# EAGLE board LCD_Disp_AIR (EAGLE 6.5.0)
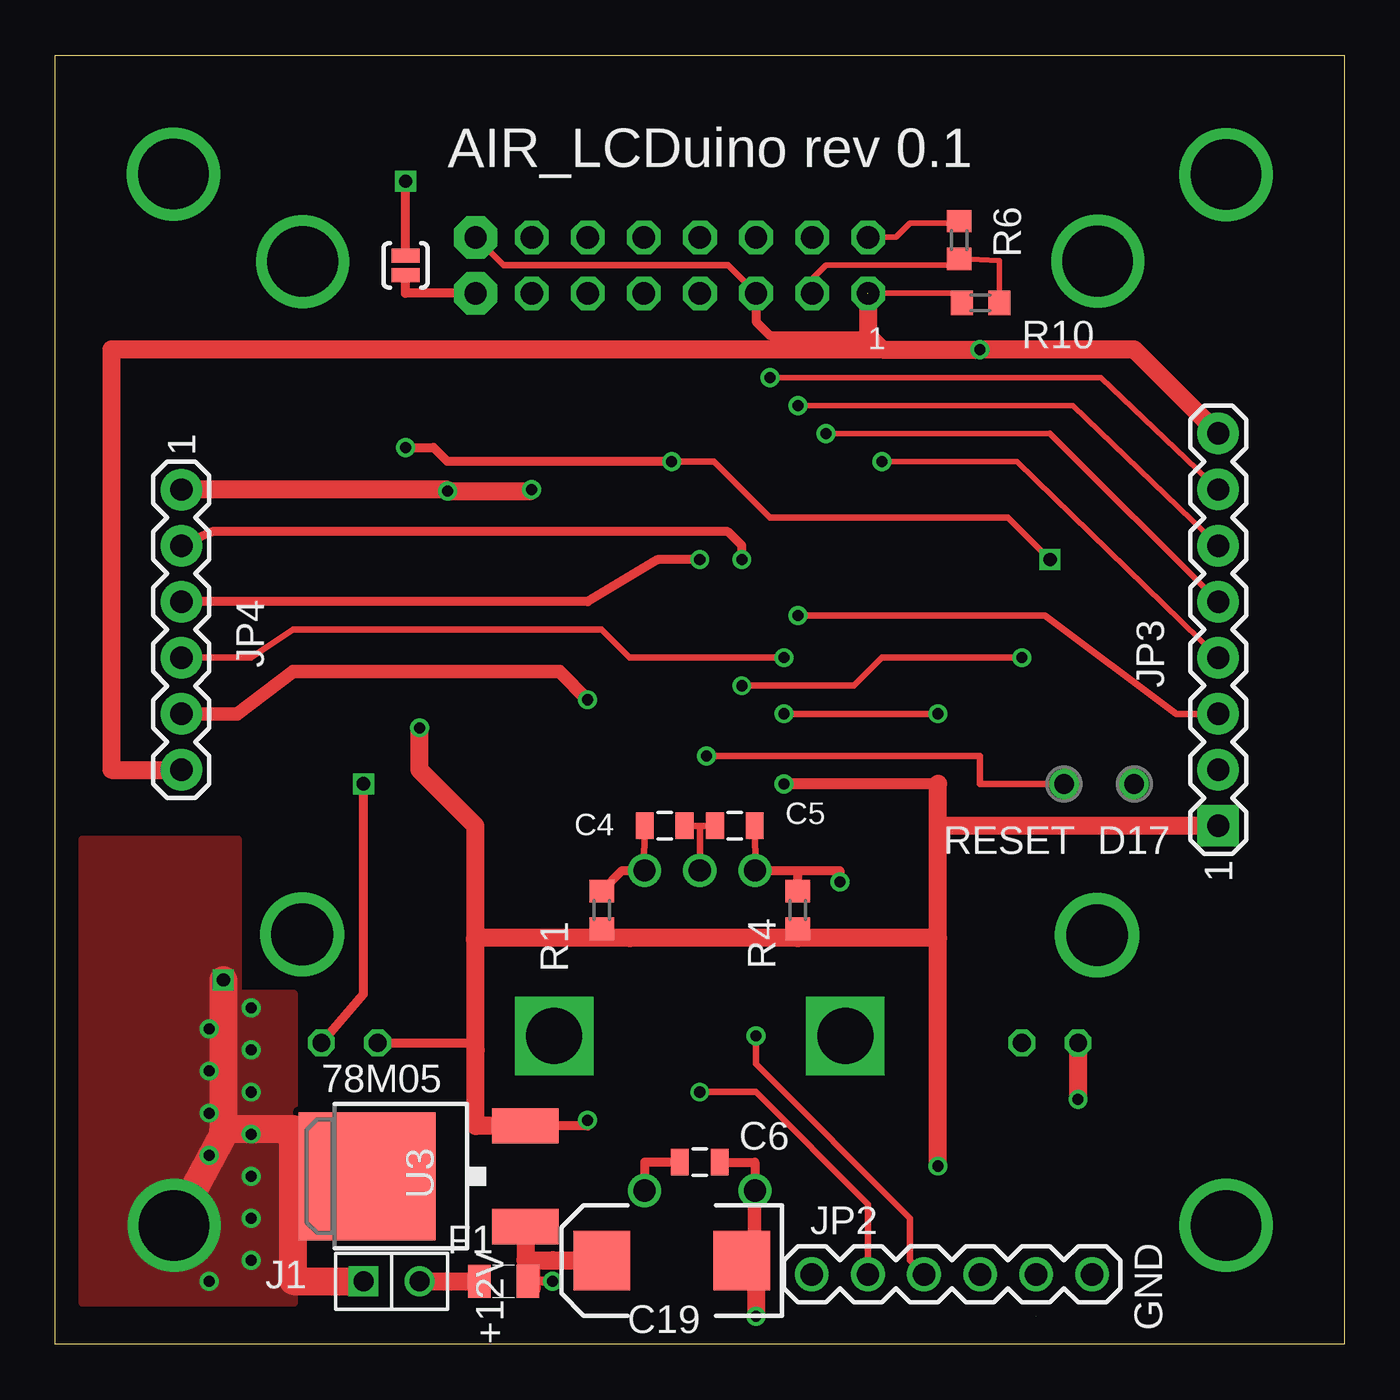
[diagram p0: board, top side]
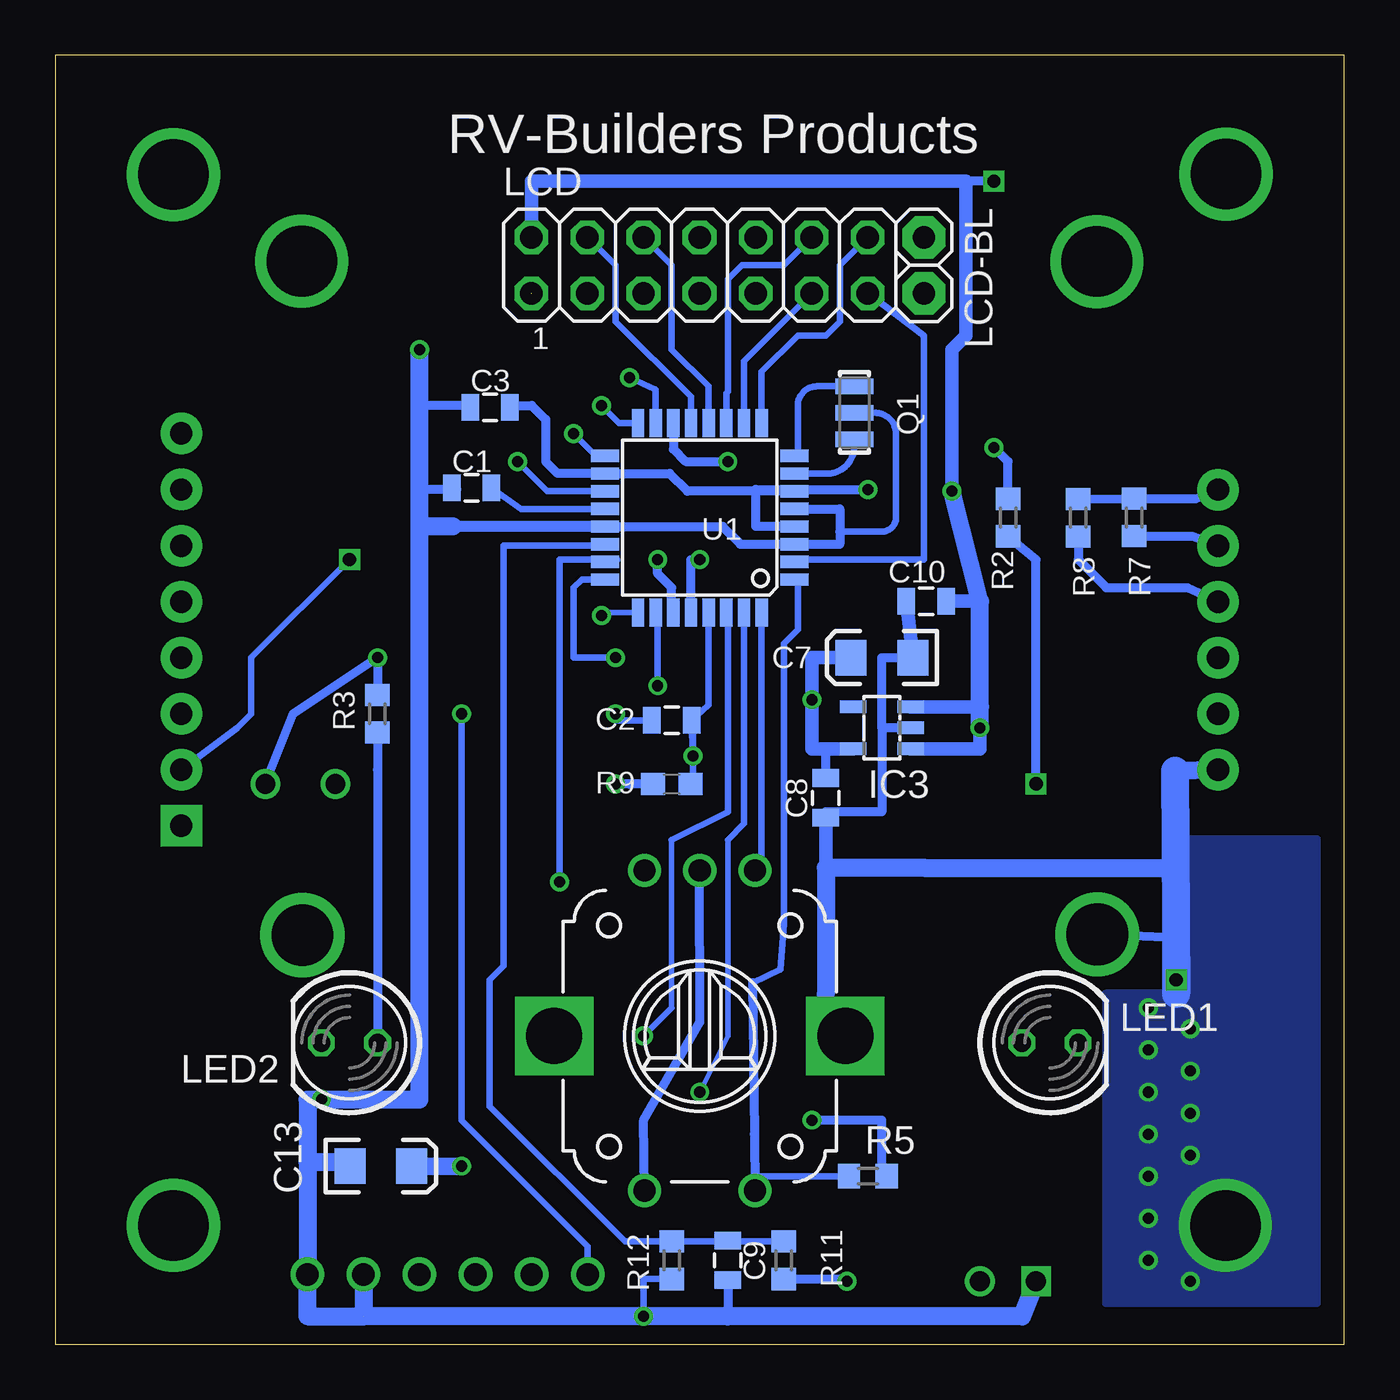
[diagram p1: board, bottom side, seen from below]

Size 58.42 x 58.42 mm. Coordinates in mm from the lower left corner, seen from the top.
Outline: 0,58.42 58.42,58.42 58.42,0 0,0 0,58.42
Copper layers (1*16): Top 0.0356mm / dielectric 1.5011mm / Bottom 0.0356mm
Design rules "OSH": minimum track width 6mil, minimum drill 13mil, track to track 6mil, track to pad 6mil, pad to pad 6mil, via to via 6mil, smd to smd 6mil, copper to edge 15mil, drill to drill 6mil, minimum pad ring 7mil, minimum via ring 7mil, stop-mask expansion 3mil, vias tented up to drill 0mil, thermal gap 10mil
Net classes: 1 vcc: width 0.254 mm

## Footprints (pad centres in the part's own frame; a part is rotated, then mirrored left to right if it is on the bottom)
0805 = smd 0.8 x 1.2: 1 -0.9,0; 2 0.9,0
EIA3216 = smd 1.4 x 1.6: A 1.4,0; C -1.4,0
EIA7343 = smd 2.55 x 2.7: A 3.17,0; C -3.17,0
P1-13 = drill 0.9: 1 0,0
PTC0805 = smd 1 x 1.5: 1 -1.1,0; 2 1.1,0
SOT23-5 = smd 0.55 x 1.2: 1 -0.95,-1.3; 2 0,-1.3; 3 0.95,-1.3; 4 0.95,1.3; 5 -0.95,1.3
M1X2 = drill 0.9 square: 1 -1.27,0 | drill 0.9: 2 1.27,0
1X06 = drill 1.016: 1 0,0; 2 2.54,0; 3 5.08,0; 4 7.62,0; 5 10.16,0; 6 12.7,0
1X08 = drill 1.016 pad 1.88 square: 1 0,0 | drill 1.016 pad 1.88: 2 2.54,0; 3 5.08,0; 4 7.62,0; 5 10.16,0; 6 12.7,0; 7 15.24,0; 8 17.78,0
1X06' = drill 1.016 pad 1.88: 1 0,0; 2 2.54,0; 3 5.08,0; 4 7.62,0; 5 10.16,0; 6 12.7,0
2X07 = drill 1.016 octagon: 1 -7.62,-1.27; 2 -7.62,1.27; 3 -5.08,-1.27; 4 -5.08,1.27; 5 -2.54,-1.27; 6 -2.54,1.27; 7 0,-1.27; 8 0,1.27; 9 2.54,-1.27; 10 2.54,1.27; 11 5.08,-1.27; 12 5.08,1.27; 13 7.62,-1.27; 14 7.62,1.27
1X02 = drill 1.016 pad 1.93 octagon: 1 -1.27,0; 2 1.27,0
LED-5MM = drill 0.813 octagon: A -1.27,0; K 1.27,0
RESONATOR-SMD = smd 0.7 x 1.7: 1 -1.2,0; 2 0,0; 3 1.2,0
R603 = smd 1 x 1.1: 1 -0.85,0; 2 0.85,0
0603 = smd 1.1 x 1: 1 -0.85,0; 2 0.85,0
SJ_2S-NO = smd 0.635 x 1.27: 1 -0.45,0; 2 0.45,0
PEC12_INCREMENTAL_ENCODER = drill 1: A -2.5,-7.5; B 2.5,-7.5; C 0,-7.5; P1 -2.5,7; P2 2.5,7 | drill 2.54 square: GND@1 -6.6,0; GND@2 6.6,0
TQFP32-08 = smd 1.27 x 0.559: 1 -4.293,2.8; 2 -4.293,2; 3 -4.293,1.2; 4 -4.293,0.4; 5 -4.293,-0.4; 6 -4.293,-1.2; 7 -4.293,-2; 8 -4.293,-2.8; 17 4.293,-2.8; 18 4.293,-2; 19 4.293,-1.2; 20 4.293,-0.4; 21 4.293,0.4; 22 4.293,1.2; 23 4.293,2; 24 4.293,2.8 | smd 0.559 x 1.27: 9 -2.8,-4.293; 10 -2,-4.293; 11 -1.2,-4.293; 12 -0.4,-4.293; 13 0.4,-4.293; 14 1.2,-4.293; 15 2,-4.293; 16 2.8,-4.293; 25 2.8,4.293; 26 2,4.293; 27 1.2,4.293; 28 0.4,4.293; 29 -0.4,4.293; 30 -1.2,4.293; 31 -2,4.293; 32 -2.8,4.293
DPACK = smd 1.6 x 3: 1 -2.28,-4.8; 3 2.28,-4.8 | smd 5.8 x 6.2: 4 0,2.38

## Placement (x,y rotation side)
C1  0.1uF  [0805]  39.55,38.81 0 bottom
C2  0.1uF  [0805]  30.48,28.28 180 bottom
C3  0.1uF  [0805]  38.71,42.47 0 bottom
C4  0.1uF  [0805]  27.62,23.5 180 top
C5  0.1uF  [0805]  30.8,23.5 0 top
C6  0.1uF  [0805]  29.21,8.25 180 top
C7  10uF  [EIA3216]  20.96,31.12 180 bottom
C8  0.1uF  [0805]  23.5,24.77 270 bottom
C9  0.1uF  [0805]  27.94,3.81 270 bottom
C10  0.1uF  [0805]  18.95,33.68 180 bottom
C13  10uF  [EIA3216]  43.66,8.08 0 bottom
C19  10uF  [EIA7343]  27.95,3.8 180 top
D17  D17-A3-PC3  [P1-13]  48.9,25.4 0 top
F1  4A  [PTC0805]  20.32,2.86 0 top
IC3  TC10553.3V  [SOT23-5]  20.96,27.94 90 bottom
J1  12V input  [M1X2]  15.24,2.86 0 top
JP2  5V UART  [1X06]  34.29,3.17 0 top
JP3  1  [1X08]  52.71,23.5 90 top
JP4  1  [1X06']  5.72,38.73 270 top
LCD  LCD  [2X07]  29.22,48.9 0 bottom
LCD-BL  [1X02]  19.05,48.9 270 bottom
LED1  [LED-5MM]  13.34,13.67 0 bottom
LED2  [LED-5MM]  45.09,13.67 180 bottom
Q1  16MHz  [RESONATOR-SMD]  22.2,42.21 270 bottom
R1  10k  [R603]  24.77,19.69 270 top
R2  470  [R603]  15.24,37.47 90 bottom
R3  470  [R603]  43.81,28.57 90 bottom
R4  10k  [R603]  33.66,19.69 90 top
R5  10k  [R603]  21.59,7.62 0 bottom
R6  [R603]  40.97,50.04 90 top
R7  100k  [R603]  9.53,37.48 270 bottom
R8  100k  [R603]  12.06,37.46 270 bottom
R9  10K  [0603]  30.48,25.39 180 bottom
R10  120  [R603]  41.94,47.19 0 top
R11  14K  [R603]  25.4,3.81 270 bottom
R12  6.8K  [R603]  30.48,3.81 90 bottom
RESET  SOLDER_POINTA  [P1-13]  45.72,25.4 0 top
SJ1  BACKLIGHT  [SJ_2S-NO]  15.88,48.9 270 top
SW1  ENCODER_SW1-PEC12  [PEC12_INCREMENTAL_ENCODER]  29.21,13.97 180 bottom
U1  ATMEGA328P-AU(R)  [TQFP32-08]  29.21,37.46 180 bottom
U3  78M05  [DPACK]  16.51,7.62 90 top

## Library data of the parts
C1-C10 C13 C19 JP2 Q1 R9 U1 = SparkFun
D17 IC3 LCD-BL RESET = 1AA_Stofer
F1 J1 LED1 LED2 R1-R8 R10-R12 SW1 = dp_devices
JP3 JP4 = SparkFun-Connectors
LCD = pinhead
SJ1 = SparkFun-Passives
U3 = wifi_WX

## Nets
5V: C3.2 C10.1 C13.A IC3.1 IC3.3 JP3.1 JP4.1 LCD.2 LED1.A R1.2 R4.1 R5.2 R6.2 R7.1 R8.1 R9.2 SJ1.1 U1.4 U1.6 U1.18 U3.3
12V_INPUT: C19.A F1.2 R11.2 U3.1
A0_PC0: C5.2 R4.2 SW1.B U1.23
A1_PC1: JP4.4 U1.24
A2_PC2: JP3.3 U1.25
A3_PC3: D17.1 R3.2 U1.26
A4_PC4_SDA: JP4.2 R7.2 U1.27
A5_PC5_SCL: JP4.3 R8.2 U1.28
ADC6: JP3.4 U1.19
ADC7: C9.1 R11.1 R12.2 U1.22
AREF: C1.2 U1.20
D2_PD2(INT0): C4.2 R1.1 SW1.A U1.32
D3_PD3(INT1): C6.2 R5.1 SW1.P1 U1.1
D4_PD4: LCD.13 U1.2
D5_PD5: LCD.14 U1.9
D6_PD6: LCD.11 U1.10
D7_PD7: LCD.12 U1.11
D8_PB0: LCD.6 U1.12
D9_PB1: LCD.4 U1.13
D10_PB2_SS: JP3.2 R2.2 U1.14
D11_PB3_MOSI: JP3.7 U1.15
D12_PB4_MISO: JP3.6 U1.16
D13_PB5_SCK: JP3.5 U1.17
GND: C1.1 C3.1 C4.1 C5.1 C6.1 C7.C C8.2 C9.2 C10.2 C13.C C19.C IC3.2 J1.1 JP2.5 JP2.6 JP3.8 JP4.6 LCD-BL.1 LCD.1 LCD.5 LED2.K Q1.2 R10.1 R12.1 SW1.C SW1.P2 U1.3 U1.5 U1.21 U3.4
N$2: LCD.3 R6.1 R10.2
N$5: Q1.1 U1.8
N$6: C2.2 JP2.1
N$9: Q1.3 U1.7
N$11: F1.1 J1.2
N$12: LED1.K R2.1
N$13: LCD-BL.2 SJ1.2
N$15: LED2.A R3.1
RESET: C2.1 R9.1 RESET.1 U1.29
RXI: JP2.3 U1.30
TXO: JP2.2 U1.31
V3_3V: C7.A C8.1 IC3.5 JP4.5

## Tracks (layer width: path | path; a pad name or v marks a point on that pad's centre or on a via)
5V  (via drill 0.5, 0.6)
  Top 0.254: LCD.2 38.1,50.17 38.73,50.8 40.88,50.8 R6.2
  Top 0.406: R1.2 26.04,18.41 | v24.13,10.16 24.13,9.9 U3.3 19.06,9.9 19.06,13.34 19.06,13.66 LED1.A | R4.1 33.66,18.41 | SJ1.1 v15.88,52.7
  Top 0.508: 40.01,23.5 40.01,25.4 34.29,25.4 v33.02,25.4
  Top 0.813: v21.59,38.73 21.51,38.66 v17.78,38.66 17.78,38.73 JP4.1 | JP3.1 40.64,23.5 40.01,23.5 | v40.01,8.08 40.01,18.41 | 19.05,18.41 19.03,18.38 19.06,18.2 19.06,13.34 19.06,9.9 U3.3 | 19.05,18.41 19.05,23.5 16.51,26.04 v16.51,27.94 | 40.01,18.41 33.66,18.41 26.04,18.41 19.05,18.41 | 40.01,18.41 40.01,25.4
  Bottom 0.254: 26.67,38.1 26.67,38.73
  Bottom 0.406: U1.6 26.67,38.66 | 26.67,38.66 29.77,38.66 30.57,39.46 U1.18 35.65,39.46 36.2,40.01 36.2,41.91 36.83,42.55 37.98,42.55 C3.2 | 26.67,38.66 26.67,38.1 26.67,37.06 U1.4 | 26.67,38.73 v21.59,38.73 | R8.1 R7.1 6.73,38.33 JP4.1 | R9.2 32.39,25.39 v33.02,25.4 | R5.2 20.96,7.62 20.96,10.16 v24.13,10.16 | v15.88,52.7 17.78,52.7
  Bottom 0.61: IC3.3 16.51,28.89 | v16.51,27.94 16.51,26.99 IC3.1 | 16.51,33.68 C10.1 | LCD.2 36.83,52.7 17.78,52.7 17.14,52.7 17.14,45.72 17.78,45.09 v17.78,38.66
  Bottom 0.813: 16.51,33.66 v17.78,38.66 | C13.A v40.01,8.08 | v16.51,27.94 16.51,28.89 16.51,33.66 | 16.51,33.66 16.51,33.68
12V_INPUT  (via drill 0.5)
  Top 0.406: v22.54,2.86 F1.2
  Top 0.813: C19.A 22.55,3.81 21.59,3.81 | U3.1 21.31,3.81 21.59,3.81 | F1.2 21.59,2.54 21.59,3.81
  Bottom 0.406: R11.2 22.86,2.96 v22.54,2.86
A0_PC0  (via drill 0.5)
  Top 0.305: C5.2 31.77,21.47
  Top 0.406: SW1.B 31.77,21.47 33.66,21.47 | 33.66,21.47 35.56,21.47 v35.56,20.96 | R4.2 33.66,21.47
  Bottom 0.305: 33.02,35.56 35.56,35.56 v35.56,20.96
  Bottom 0.406: U1.23 33.02,35.56
A1_PC1  (via drill 0.5)
  Top 0.305: JP4.4 8.89,31.12 10.8,32.38 24.77,32.38 26.04,31.12 v33.02,31.12
  Bottom 0.305: U1.24 34.55,34.66 34.93,34.29 34.93,31.12 v33.02,31.12
A2_PC2  (via drill 0.5)
  Top 0.305: v33.66,33.02 44.86,33.02 50.8,28.57 JP3.3
  Bottom 0.254: U1.25 33.51,33.17 v33.66,33.02
A3_PC3  (via drill 0.5)
  Top 0.305: v31.12,29.84 36.2,29.84 37.47,31.12 v43.81,31.12
  Bottom 0.305: U1.26 31.12,33.17 v31.12,29.84
  Bottom 0.406: R3.2 v43.81,31.12 47.62,28.57 D17.1
A4_PC4_SDA  (via drill 0.5)
  Top 0.406: v31.12,35.56 31.12,36.2 30.48,36.83 7.11,36.83 JP4.2
  Bottom 0.406: U1.27 30.48,33.24 30.48,34.29 31.12,34.93 v31.12,35.56 | R7.2 6.91,36.62 JP4.2
A5_PC5_SCL  (via drill 0.5)
  Top 0.406: v29.21,35.56 27.3,35.56 24.13,33.66 6.35,33.66 6.35,33.53 JP4.3
  Bottom 0.406: U1.28 29.61,35.56 v29.21,35.56 | R8.2 12.06,35.56 10.8,34.29 7.11,34.29 JP4.3
ADC6  (via drill 0.5)
  Top 0.254: v37.47,40.01 43.59,40.01 JP3.4
  Bottom 0.305: U1.19 36.12,38.66 v37.47,40.01
ADC7
  Bottom 0.305: U1.22 33.5,36.2 38.1,36.2 38.1,17.14 38.73,16.51 38.73,10.8 32.6,4.66 R12.2 27.94,4.66 | R11.1 27.94,4.66 | C9.1 27.94,4.66
AREF
  Bottom 0.305: U1.20 37.31,37.86 C1.2
D2_PD2(INT0)
  Top 0.305: C4.2 26.66,21.47
  Top 0.406: R1.1 25.7,21.47 26.66,21.47 SW1.A
  Bottom 0.305: U1.32 26.41,21.47 SW1.A
D3_PD3(INT1)
  Top 0.406: C6.2 26.71,8.25 SW1.P1
  Bottom 0.305: 26.82,16.39 25.55,17 25.4,19.05 25.4,31.75 24.77,32.38 24.77,34.66 U1.1 | R5.1 26.74,7.62 26.74,9.52
  Bottom 0.406: 26.82,16.39 26.74,9.52 SW1.P1
D4_PD4
  Bottom 0.254: 24.82,35.56 U1.2
  Bottom 0.305: LCD.13 19.05,45.71 19.05,35.56 24.91,35.56 U1.2
D5_PD5
  Bottom 0.305: U1.9 26.41,44.08 24.77,45.72 23.5,45.72 22.86,46.36 22.86,48.91 LCD.14
D6_PD6
  Bottom 0.254: LCD.11 24.14,47.62
  Bottom 0.305: 24.14,47.62 27.21,44.55 U1.10
D7_PD7
  Bottom 0.254: LCD.12 24.14,50.16 | 28.01,43.11 27.94,43.18
  Bottom 0.305: 24.14,50.16 25.4,48.9 27.3,48.9 27.94,48.26 27.94,43.18 | U1.11 28.01,43.11
D8_PB0
  Bottom 0.254: LCD.6
  Bottom 0.305: LCD.6 30.48,48.9 30.48,45.09 28.81,43.41 U1.12
D9_PB1
  Bottom 0.254: LCD.4
  Bottom 0.305: LCD.4 33.02,48.9 33.02,46.36 29.61,42.94 U1.13
D10_PB2_SS  (via drill 0.5, 0.6)
  Top 0.305: v27.94,40.01 29.84,40.01 32.38,37.47 43.18,37.47 v45.09,35.56
  Top 0.406: v27.94,40.01 17.78,40.01 17.14,40.64 v15.88,40.64
  Bottom 0.305: v45.09,35.56 49.53,31.12 49.53,28.57 50.16,27.94 JP3.2
  Bottom 0.406: U1.14 30.41,40.57 29.84,40.01 v27.94,40.01 | R2.2 15.24,40.01 v15.88,40.64
D11_PB3_MOSI  (via drill 0.5)
  Top 0.254: v32.38,43.81 47.4,43.81 JP3.7
  Bottom 0.305: U1.15 31.21,43.27 v32.38,43.81
D12_PB4_MISO  (via drill 0.5)
  Top 0.254: v33.66,42.55 46.13,42.55 JP3.6
  Bottom 0.305: U1.16 32.86,41.75 v33.66,42.55
D13_PB5_SCK  (via drill 0.5)
  Top 0.254: v34.93,41.27 45.09,41.27
  Top 0.305: 45.09,41.27 JP3.5
  Bottom 0.254: U1.17 33.91,40.26
  Bottom 0.305: 33.91,40.26 v34.93,41.27
GND  (via drill 0.5, 0.6, 2.8, 3.2)  (2 unrouted)
  Top 0.254: LCD.1 40.65,47.63 R10.1
  Top 0.305: C4.1 29.21,23.5 | 29.21,23.5 C5.1 | SW1.C 29.21,23.5 | LCD-BL.1 20.32,48.9 30.49,48.9 LCD.5
  Top 0.406: LCD.5 31.76,46.35 32.38,45.72 36.83,45.72 | C6.1 31.71,8.25 SW1.P2 | 10.8,9.75 13.34,9.75 13.34,7.62
  Top 0.61: SW1.P2 31.68,6.97 31.68,3.12
  Top 0.813: 36.83,47.62 36.83,45.72 37.47,45.09 | 37.47,45.09 v41.91,45.09 48.9,45.09 JP3.8 | C19.C 31.68,3.12 31.75,3.04 v31.75,1.27 | LED2.K v46.36,11.1 | 37.47,45.09 2.54,45.09 2.54,26.04 JP4.6
  Top 1.27: J1.1 10.8,2.86 10.8,9.75 7.62,9.75 | U3.4 13.34,7.62 11.43,7.62 | v7.62,16.51 7.62,9.75 | 7.62,9.75 7.62,9.52 v5.38,5.38
  Bottom 0.254: Q1.2 21.26,42.22
  Bottom 0.305: 21.26,42.22 arc90 20.32,41.27 20.32,37.47 arc90 20.96,36.83 22.86,36.83 | R12.1 31.75,2.96 v31.75,1.27
  Bottom 0.406: U1.21 28.17,37.06 27.37,36.26 U1.3 22.86,36.26 22.86,36.83 22.86,37.86 U1.5 | C3.1 39.44,42.55 41.91,42.55 | 40.27,38.73 41.91,38.73 | SW1.P2 31.75,10.16 29.21,14.61 SW1.C | C9.2 27.94,1.27 | IC3.2 20.96,27.94 | 20.96,27.94 20.96,31.12 C7.C | 20.96,27.94 20.96,24.13 23.5,24.13 C8.2 | 7.62,18.41 v11.2,18.58 | 19.05,21.59
  Bottom 0.508: U1.21 40.41,37.06 | C1.1 arc90 40.27,38.73
  Bottom 0.61: 23.5,21.59 C8.2 | C10.2 19.55,31.14 C7.C
  Bottom 0.813: 41.91,37.06 41.91,11.1 v46.36,11.1 46.99,11.1 46.99,8.25 | JP4.6 7.67,25.98 | 40.41,37.06 41.91,37.06 | 41.91,37.06 41.91,38.73 41.91,42.55 v41.91,45.09 | 46.99,8.25 46.99,2.54 JP2.6 46.99,1.27 44.45,1.27 JP2.5 | J1.1 14.61,1.27 27.94,1.27 v31.75,1.27 44.45,1.27 | 7.62,20.32 7.62,21.59 19.05,21.59 23.5,21.59 23.5,15.88 | 7.62,18.75 7.62,18.41 v7.62,16.51 | C13.C 45.24,8.25 46.99,8.25
  Bottom 1.27: 7.67,25.98 7.62,15.88 v7.62,16.51 7.62,18.75 7.62,20.32
  other vias: 8.89,15.24 6.99,8.57 6.99,10.48 6.99,12.38 8.89,9.52 8.89,7.62 8.89,11.43 6.99,14.29 8.89,13.34 8.89,5.72 8.89,3.81 6.99,2.86
  pour Top: 1.27,1.91 1.27,22.86 8.25,22.86 8.25,15.88 10.8,15.88 10.8,1.91
  pour Bottom: 1.27,1.91 1.27,22.86 7.62,22.86 7.62,15.88 10.8,15.88 10.8,1.91
N$1  (via drill 3.2)
  other vias: 11.22,49.07
N$2
  Top 0.254: LCD.3 34.3,48.27 34.93,48.9 41.31,48.9 R6.1 42.79,49.1 R10.2
N$3  (via drill 3.2)
  other vias: 53.06,53.01
N$4  (via drill 3.2)
  other vias: 5.36,53.04
N$5
  Bottom 0.254: 24.77,40.41 arc90 U1.8
  Bottom 0.305: Q1.1 23.89,43.41 arc-90 24.77,42.55 24.77,40.41
N$6  (via drill 0.5)
  Top 0.305: v33.02,28.57 v40.01,28.57
  Bottom 0.305: 31.47,28.57 C2.2 33.02,28.28 v33.02,28.57 | JP2.1 34.29,4.45 40.01,10.16 v40.01,28.57
N$7  (via drill 3.2)
  other vias: 53.06,5.38
N$9
  Bottom 0.254: 22.23,40.99 arc90 Q1.3
  Bottom 0.305: U1.7 23.4,39.46 arc-90 22.23,40.64 22.23,40.99
N$10  (via drill 3.2)
  other vias: 47.24,49.09
N$11
  Top 0.813: J1.2 F1.1
N$12  (via drill 0.6)
  Top 0.406: LED1.K 13.97,15.88 v13.97,25.4
  Bottom 0.406: v13.97,25.4 13.97,35.56 R2.1
N$13
  Top 0.406: LCD-BL.2 15.88,47.62 SJ1.2
N$15
  Bottom 0.406: 43.81,26.04 R3.1 LED2.A
N$16  (via drill 2.8)
  other vias: 47.21,18.54
RESET  (via drill 0.5)
  Top 0.305: RESET.1 41.91,25.4 41.91,26.67 v29.51,26.67
  Bottom 0.305: U1.29 28.81,28.98 C2.1 v29.51,26.67 | 29.51,28.25 v29.51,26.67 | v29.51,26.67 29.51,25.51 R9.1
  Bottom 0.406: 29.51,28.25 C2.1
RXI  (via drill 0.5)
  Top 0.305: v31.75,13.97 31.75,12.7 38.73,5.72 38.73,3.81 JP2.3
  Bottom 0.254: U1.30 27.94,33.17 | 30.48,22.86 30.48,15.24
  Bottom 0.305: 27.94,33.17 27.94,24.13 30.48,22.86 | 30.48,15.24 v31.75,13.97
TXO  (via drill 0.5)
  Top 0.305: v29.21,11.43 31.75,11.43 36.83,6.35 JP2.2
  Bottom 0.254: 27.94,22.86 27.94,13.97 v29.21,11.43
  Bottom 0.305: U1.31 27.21,23.59 27.94,22.86
V3_3V  (via drill 0.5)
  Top 0.61: v24.13,29.21 22.86,30.48 10.8,30.48 8.25,28.57 JP4.5
  Bottom 0.406: C8.1 23.5,26.99
  Bottom 0.61: IC3.5 23.5,26.99 24.13,26.99 v24.13,29.21 24.13,31.12 C7.A

## Text on the board
tPlace: AIR_LCDuino rev 0.1 | 1 | +12V | GND
bPlace: RV-Builders Products | 1